# EAGLE board p (EAGLE 7.1.0)
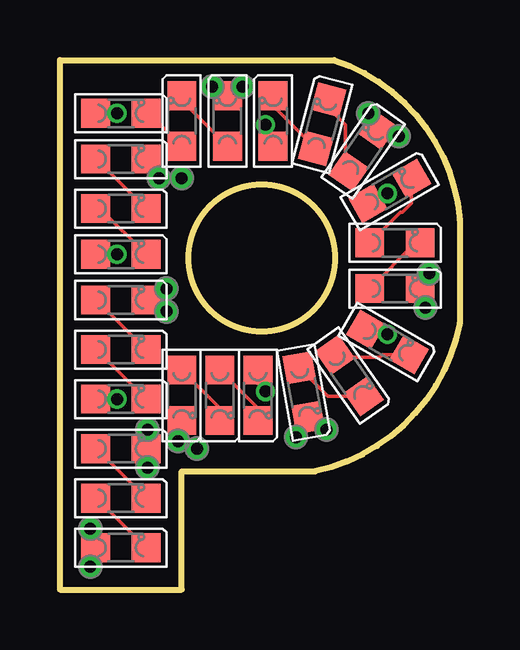
[diagram p0: board, top side]
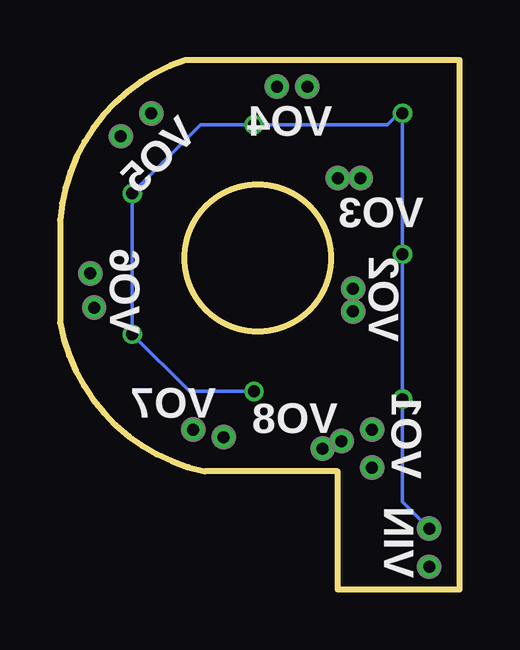
[diagram p1: board, bottom side, seen from below]

Size 16.67 x 22.07 mm. Coordinates in mm from the lower left corner, seen from the top.
Outline: 0,0 5.08,0 5.08,4.92 10.64,4.92 arc67 16.67,11.11 16.67,15.4 arc67 11.43,22.07 0,22.07 0,0
Outline: circle at 8.41,13.81 radius 3.05
Copper layers (1*16): Top 0.035mm / dielectric 1.5mm / Bottom 0.035mm
Design rules "Fusion_eagle_rule_v1.1_tms *": minimum track width 6mil, minimum drill 12mil, track to track 6mil, track to pad 6mil, pad to pad 6mil, via to via 6mil, smd to smd 0mil, copper to edge 10mil, drill to drill 10mil, minimum pad ring 10mil, minimum via ring 6mil, stop-mask expansion 2mil, vias tented up to drill 100mil, thermal gap 10mil

## Footprints (pad centres in the part's own frame; a part is rotated, then mirrored left to right if it is on the bottom)
LED_0805 = smd 1.2 x 1.2: A 0,-1.05; C 0,1.05
P1-20 = drill 0.5: TP 0,0

## Placement (x,y rotation side)
LED1  [LED_0805]  2.54,1.75 270 top
LED2  [LED_0805]  2.54,3.81 270 top
LED3  [LED_0805]  2.54,5.87 270 top
LED4  [LED_0805]  2.54,7.94 270 top
LED5  [LED_0805]  2.54,10 270 top
LED6  [LED_0805]  2.54,12.06 270 top
LED7  [LED_0805]  2.54,13.97 270 top
LED8  [LED_0805]  2.54,15.88 270 top
LED9  [LED_0805]  2.54,17.94 270 top
LED10  [LED_0805]  2.54,19.84 270 top
LED11  [LED_0805]  5.08,19.53 0 top
LED12  [LED_0805]  6.99,19.53 0 top
LED13  [LED_0805]  8.89,19.53 0 top
LED14  [LED_0805]  10.94,19.39 345 top
LED15  [LED_0805]  12.64,18.29 325 top
LED16  [LED_0805]  13.75,16.61 300 top
LED17  [LED_0805]  13.97,14.45 270 top
LED18  [LED_0805]  13.97,12.54 270 top
LED19  [LED_0805]  13.65,10.32 240 top
LED20  [LED_0805]  12.07,8.92 215 top
LED21  [LED_0805]  10.17,8.21 190 top
LED22  [LED_0805]  8.26,8.1 180 top
LED23  [LED_0805]  6.67,8.1 180 top
LED24  [LED_0805]  5.08,8.1 180 top
VIN  [P1-20]  1.27,0.95 180 top
VIN1  [P1-20]  1.27,2.54 0 top
VO1  [P1-20]  3.65,5.08 180 top
VO2  [P1-20]  4.45,11.59 180 top
VO3  [P1-20]  4.13,17.14 180 top
VO4  [P1-20]  6.35,20.96 180 top
VO5  [P1-20]  14.13,18.89 180 top
VO6  [P1-20]  15.24,11.75 180 top
VO7  [P1-20]  11.11,6.67 0 top
VO8  [P1-20]  5.71,5.87 0 top
VO9  [P1-20]  3.65,6.67 0 top
VO10  [P1-20]  4.45,12.54 0 top
VO11  [P1-20]  5.08,17.14 0 top
VO12  [P1-20]  7.62,20.96 0 top
VO13  [P1-20]  12.86,19.84 0 top
VO14  [P1-20]  15.4,13.18 0 top
VO15  [P1-20]  9.84,6.35 0 top
VO16  [P1-20]  4.92,6.19 0 top

## Library data of the parts
LED1-LED24 VIN VIN1 VO1-VO16 = CyberRailGuru

## Nets
N$1: LED2.C LED3.A
N$2: LED1.C LED2.A
N$3: LED19.C LED20.A
N$4: LED20.C LED21.A
N$5: LED5.C LED6.A
N$6: LED4.C LED5.A
N$7: LED22.C LED23.A
N$8: LED23.C LED24.A
N$9: LED8.C LED9.A
N$10: LED7.C LED8.A
N$11: LED24.C VO8.TP VO16.TP
N$12: LED21.C VO7.TP VO15.TP
N$13: LED11.C LED12.A
N$14: LED10.C LED11.A
N$17: LED14.C LED15.A
N$18: LED13.C LED14.A
N$21: LED17.C LED18.A
N$22: LED16.C LED17.A
VIN: LED1.A LED4.A LED7.A LED10.A LED13.A LED16.A LED19.A LED22.A VIN1.TP VIN.TP
VOUT1: LED3.C VO1.TP VO9.TP
VOUT2: LED6.C VO2.TP VO10.TP
VOUT3: LED9.C VO3.TP VO11.TP
VOUT4: LED12.C VO4.TP VO12.TP
VOUT5: LED15.C VO5.TP VO13.TP
VOUT6: LED18.C VO6.TP VO14.TP

## Tracks (layer width: path | path; a pad name or v marks a point on that pad's centre or on a via)
N$1
  Top 0.152: LED3.A 1.53,5.87 LED2.C
N$2
  Top 0.152: LED2.A 1.53,3.81 LED1.C
N$3
  Top 0.152: LED19.C 13.45,9.79 13.34,9.68 11.56,9.68 LED20.A
N$4
  Top 0.152: LED20.C 11.17,8.06 LED21.A
N$5
  Top 0.152: LED6.A 1.53,12.06 LED5.C
N$6
  Top 0.152: LED5.A 1.53,10 LED4.C
N$7
  Top 0.152: LED22.C 8.26,7.56 LED23.A
N$8
  Top 0.152: LED23.C 6.67,7.56 LED24.A
N$9
  Top 0.152: LED9.A 1.53,17.94 LED8.C
N$10
  Top 0.152: LED8.A 1.69,15.87 LED7.C
N$11
  Top 0.152: LED24.C 5.08,6.35 VO16.TP 5.4,6.19 VO8.TP
N$12
  Top 0.152: VO15.TP 10.35,6.86 LED21.C 10.6,7.18 VO7.TP
N$13
  Top 0.152: LED11.C 5.08,20.38 LED12.A
N$14
  Top 0.152: LED10.C 3.71,19.84 LED11.A
N$17
  Top 0.152: LED14.C 11.21,20.06 11.91,19.37 11.91,17.57 LED15.A
N$18
  Top 0.152: LED13.C 8.89,20.16 LED14.A
N$21
  Top 0.152: LED17.C 14.82,14.45 LED18.A
N$22
  Top 0.152: LED16.C 14.66,16.09 14.29,15.72 14.19,15.72 LED17.A
VIN  (via drill 0.5)
  Top 0.152: VIN.TP 1.27,1.53 LED1.A 1.27,1.97 VIN1.TP 1.11,2.54 | 1.11,7.94 LED4.A v2.38,7.94 | 12.84,16.02 LED16.A 13.23,16.09 v13.65,16.51 | LED13.A 8.57,18.48 v8.57,19.37 | LED19.A 13.29,10.84 v13.65,10.64 | LED22.A 8.26,8.57 v8.57,8.25 | LED10.A v2.38,19.84 | v2.38,13.97 LED7.A
  Bottom 0.152: 13.49,10.79 v13.65,10.64 | v8.57,8.25 11.27,8.25 v13.65,10.64 | VIN1.TP 2.38,3.65 v2.38,7.94 v2.38,13.97 v2.38,19.84 2.54,19.84 3.02,19.37 v8.57,19.37 10.79,19.37 v13.65,16.51 v13.65,10.64
VOUT1
  Top 0.152: VO9.TP 3.65,5.93 LED3.C 3.65,5.81 VO1.TP
VOUT2
  Top 0.152: LED6.C 4.07,12.54 VO10.TP VO2.TP
VOUT3
  Top 0.152: LED9.C 3.59,17.68 VO3.TP VO11.TP
VOUT4
  Top 0.152: VO12.TP 7.36,20.95 LED12.C 6.61,20.95 VO4.TP
VOUT5
  Top 0.152: VO5.TP 13.51,18.89 LED15.C 12.86,19.54 VO13.TP
VOUT6
  Top 0.152: VO14.TP 15.4,12.92 LED18.C 15.24,12.32 VO6.TP

## Text on the board
201bmp: P